# EAGLE board 555ic (EAGLE 9.6.2)
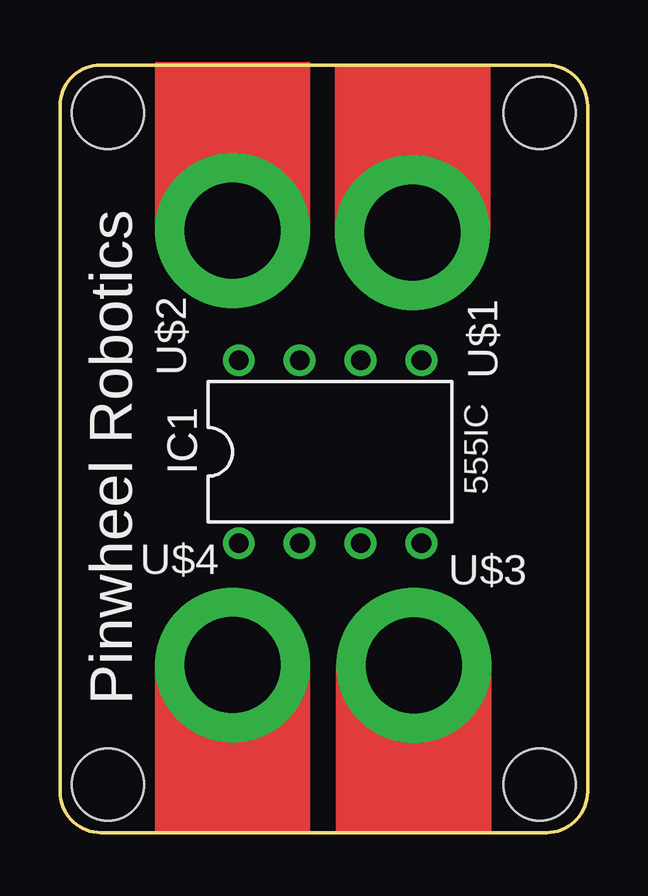
[diagram p0: board, top side]
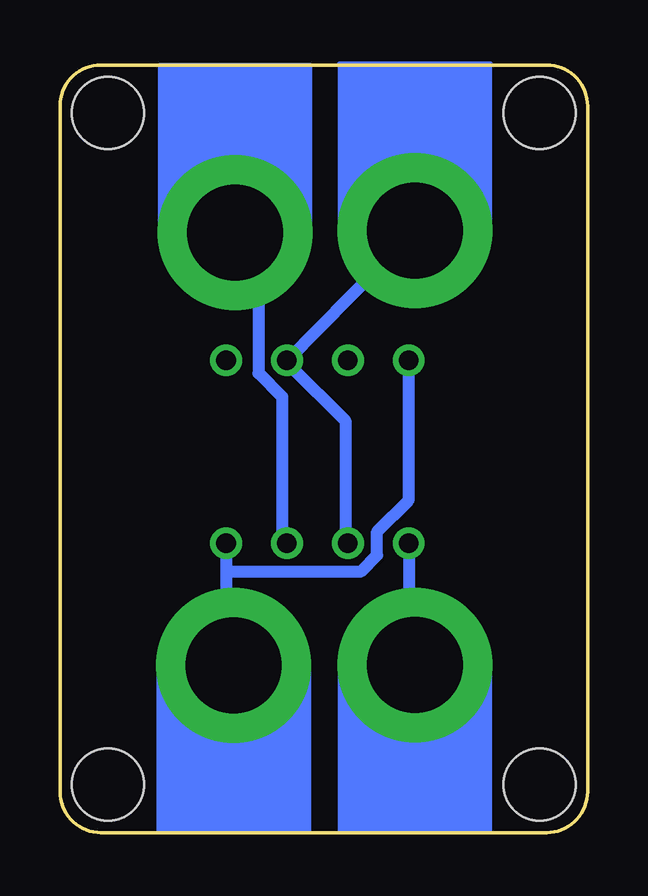
[diagram p1: board, bottom side, seen from below]

Size 22 x 32 mm. Coordinates in mm from the lower left corner, seen from the top.
Outline: 22,30.29 22,1.71 arc-90 20.29,0 1.71,0 arc-90 0,1.71 0,30.29 arc-90 1.71,32 20.29,32 arc-90 22,30.29
Copper layers (1*16): Top 0.035mm / dielectric 1.5mm / Bottom 0.035mm
Design rules "default *": minimum track width 20mil, minimum drill 0.35mm, track to track 6mil, track to pad 6mil, pad to pad 6mil, via to via 6mil, smd to smd 6mil, copper to edge 40mil, drill to drill 6mil, minimum pad ring 10mil, minimum via ring 8mil, stop-mask expansion 4mil, vias tented up to drill 0mil, thermal gap 10mil
Holes 3 mm at 2,30 20,30 20,2 2,2

## Footprints (pad centres in the part's own frame; a part is rotated, then mirrored left to right if it is on the bottom)
DIL08 = drill 0.813 pad 1.27: 1 -3.81,-3.81; 2 -1.27,-3.81; 3 1.27,-3.81; 4 3.81,-3.81; 5 3.81,3.81; 6 1.27,3.81; 7 -1.27,3.81; 8 -3.81,3.81
MICROBIT_PAD = drill 4 pad 6.452: PAD 0,0

## Placement (x,y rotation side)
IC1  LM555N  [DIL08]  11.26,15.88 0 top
U$1  MICROBIT_PAD  [MICROBIT_PAD]  14.7,25.02 180 top
U$2  MICROBIT_PAD  [MICROBIT_PAD]  7.2,25.1 180 top
U$3  MICROBIT_PAD  [MICROBIT_PAD]  14.76,6.97 0 top
U$4  MICROBIT_PAD  [MICROBIT_PAD]  7.2,6.99 0 top

## Library data of the parts
IC1 = linear
U$1-U$4 = microbit

## Nets
5V: IC1.4 IC1.8 U$3.PAD
GND: IC1.1 U$4.PAD
N$1: IC1.3 U$1.PAD
N$2: IC1.2 IC1.6 U$2.PAD

## Tracks (layer width: path | path; a pad name or v marks a point on that pad's centre or on a via)
5V
  Bottom 0.508: 15.05,10.9 15.05,7.02 U$3.PAD | 15.05,10.9 15.05,11.89 IC1.4 | IC1.8 7.45,13.87 8.77,12.55 8.77,11.56 9.43,10.9 15.05,10.9
GND
  Bottom 0.508: IC1.1 7.45,6.69 U$4.PAD
N$1
  Bottom 0.508: IC1.3 12.74,12.22 12.74,18.16 13.73,19.15 13.73,24.11 14.64,25.02 U$1.PAD
N$2
  Bottom 0.508: IC1.2 10.09,12.22 10.09,17.17 12.41,19.48 IC1.6 U$2.PAD

## Text on the board
tPlace: 555IC | Pinwheel Robotics